# Altium PCB PCB_n-watch v2.0_2022-03-19.pcbdoc
Units mm, origin at the board's own origin, x right, y up, seen from the top; angles counter-clockwise.
Board outline 62.72 x 72.25 mm, 2 copper layers (Top Layer, Bottom Layer); 53 components, 63 nets, 234 pads, 221 vias.
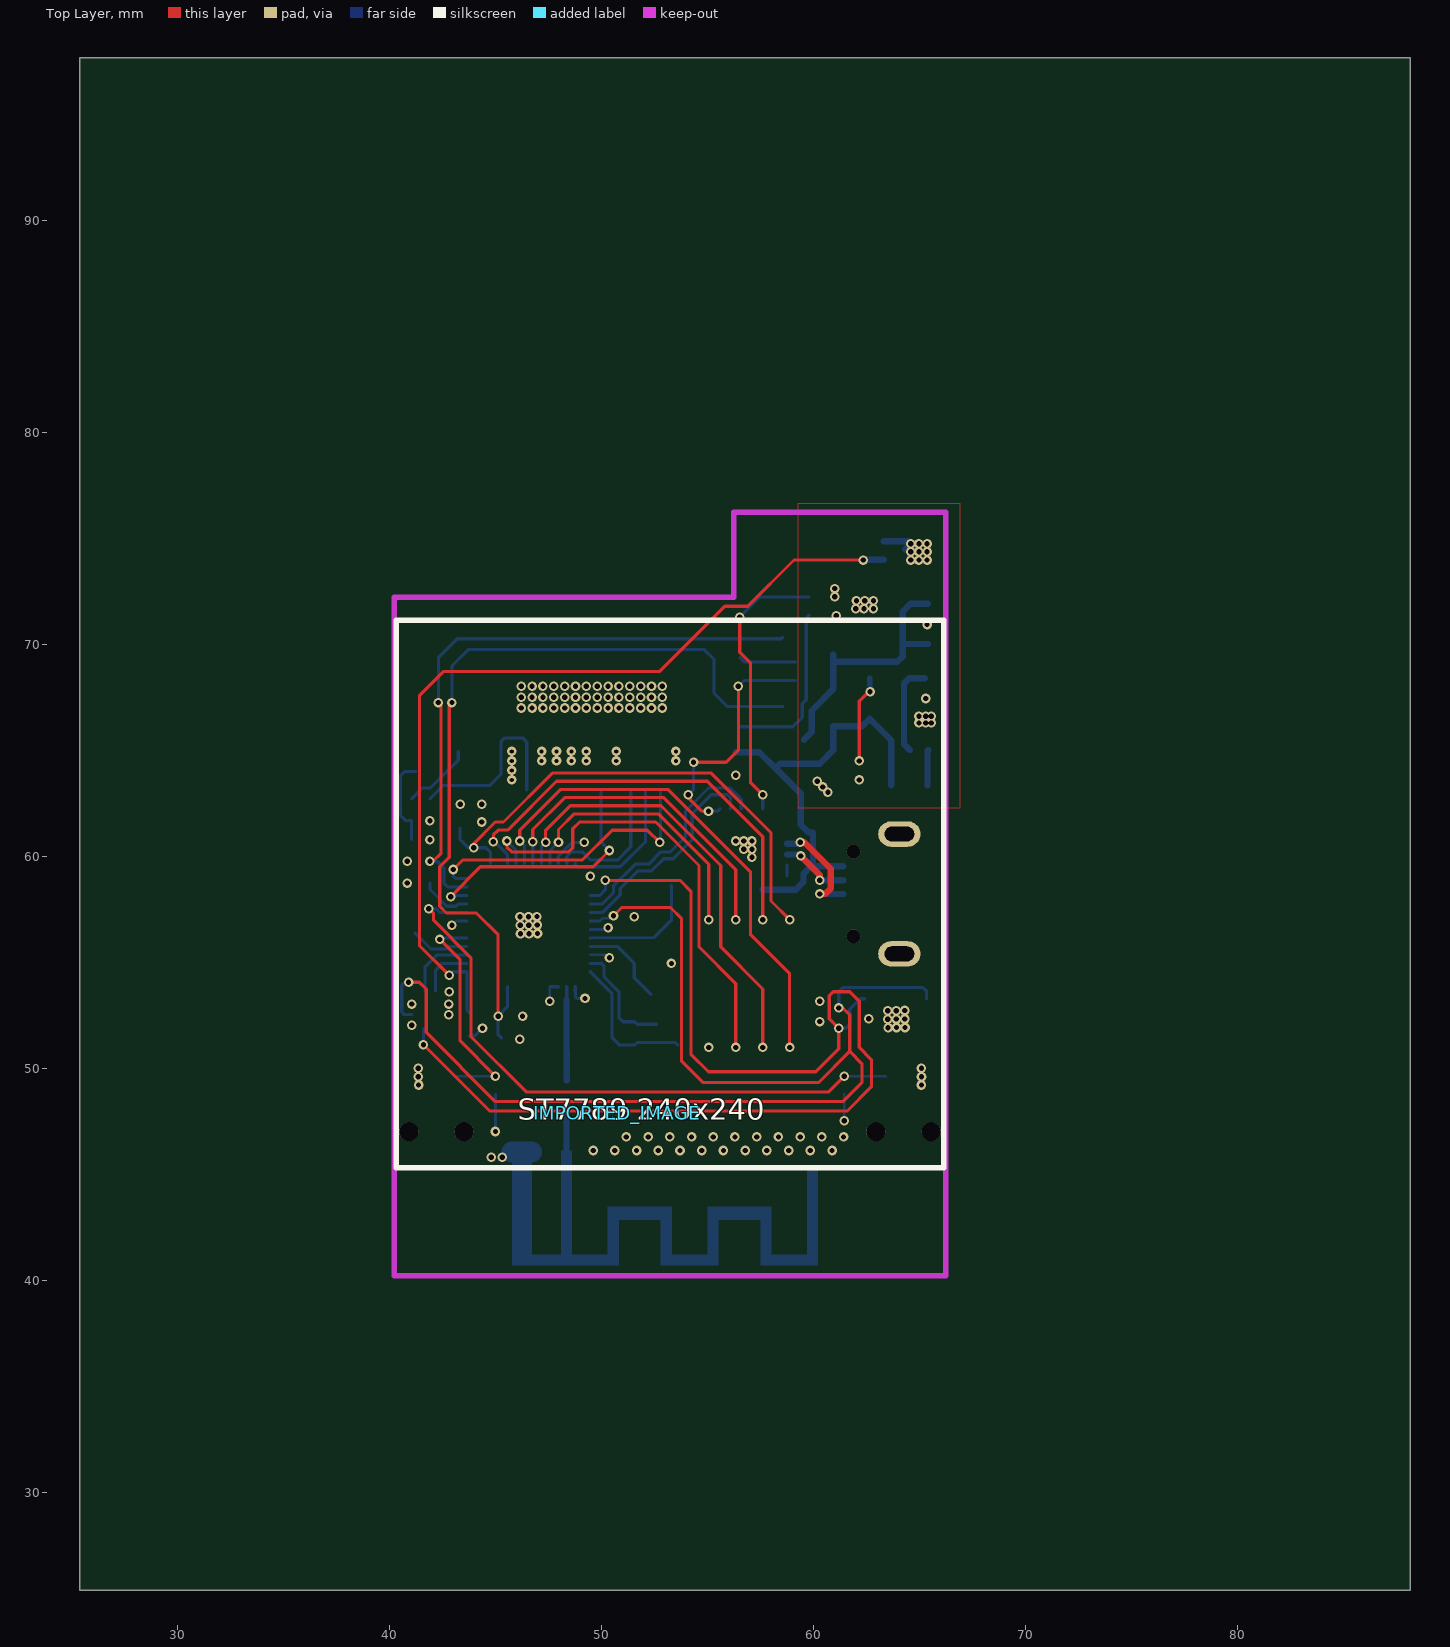
[diagram p0: Top Layer view]
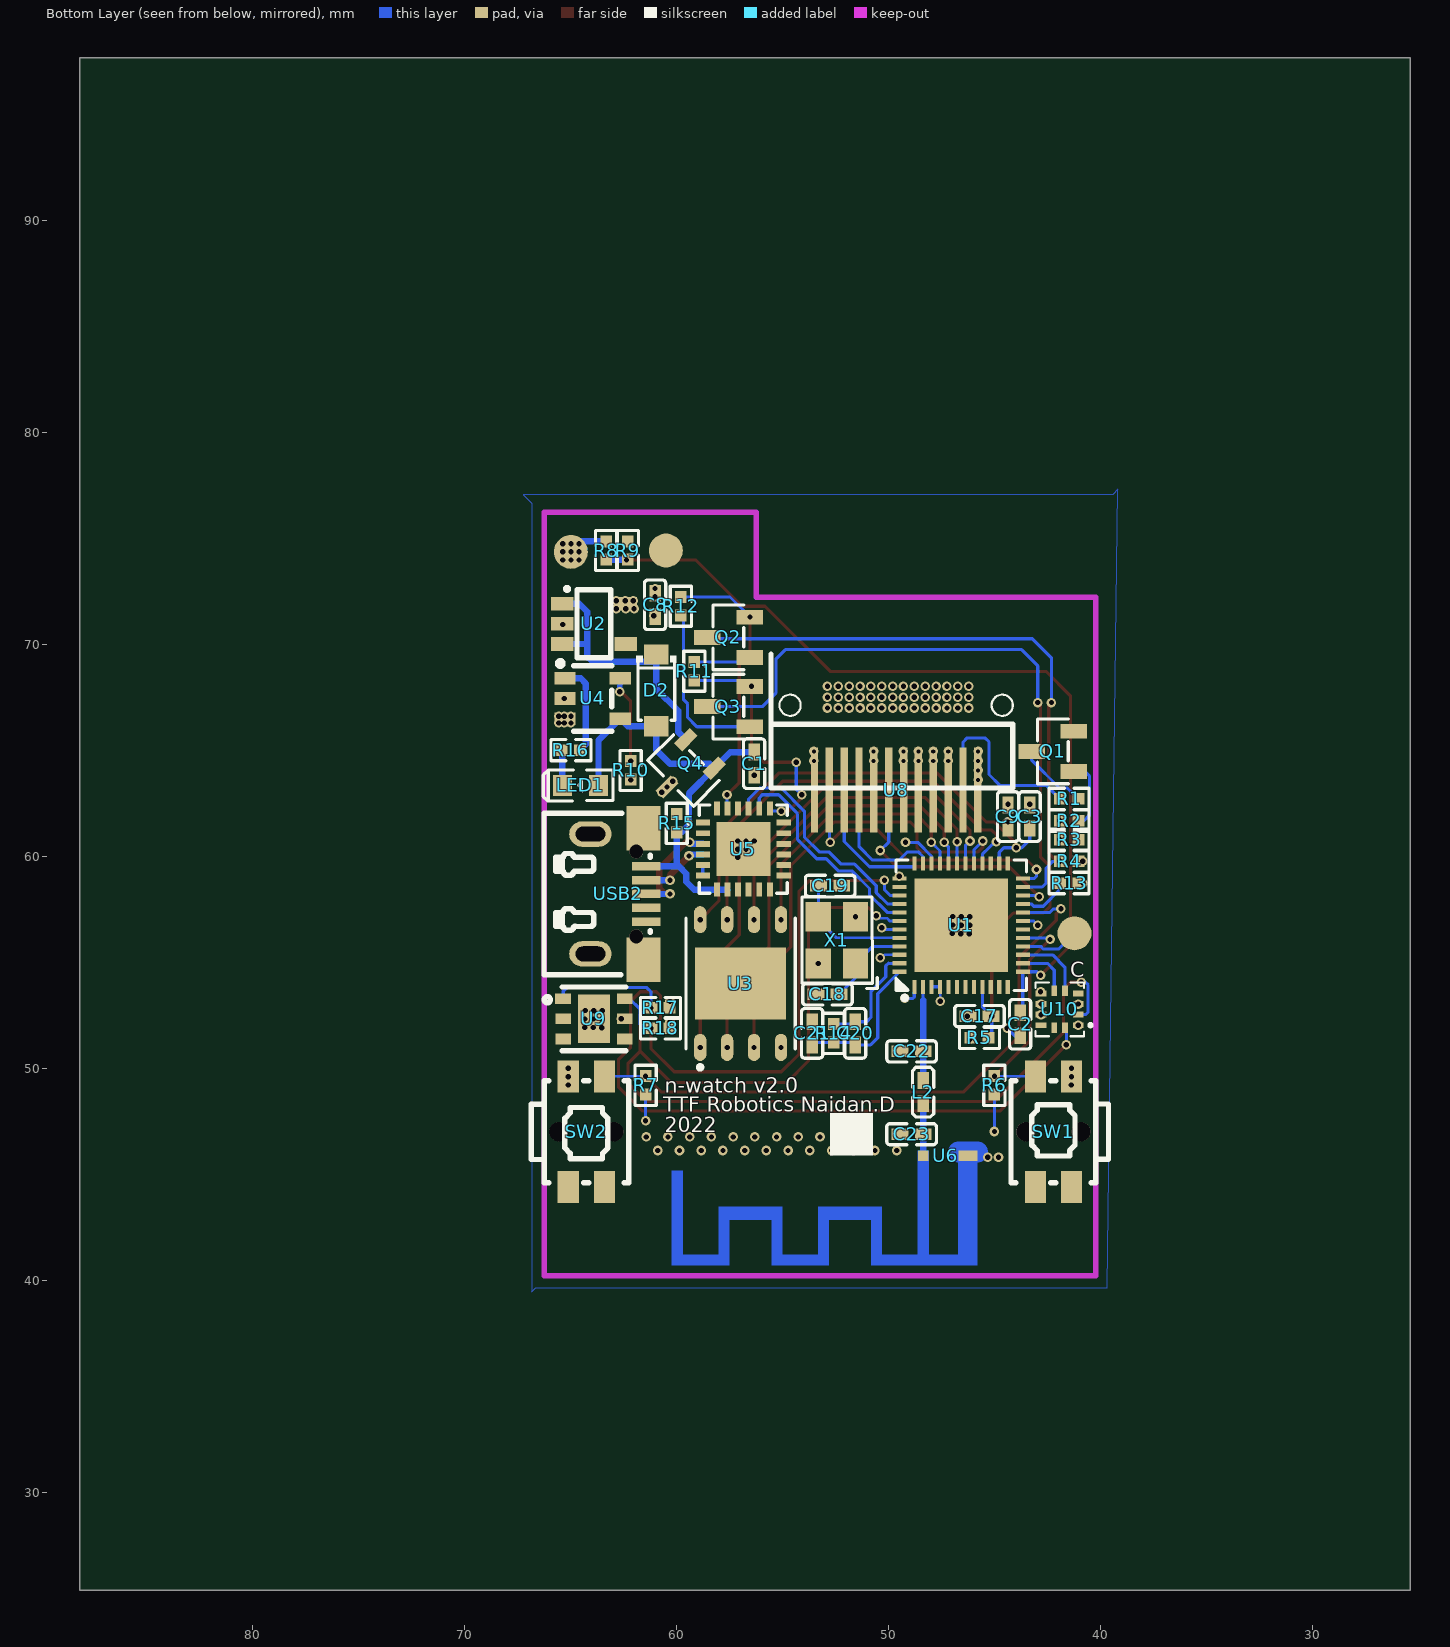
[diagram p1: Bottom Layer view, seen from below]

## Layer stack, top to bottom
Top Layer: signal copper (thickness not stored)
Dielectric: dielectric 0.32, FR-4, Dk 4.8
Bottom Layer: signal copper (thickness not stored)

## Board outline
88.122,25.4 25.4,25.4 25.4,97.654 88.122,97.654

## Components (designator, comment, footprint, x,y, rotation, side; value= is the part's Value field where it differs from the comment)
C1 "0.1uF" C0402 56.325,64.373 r90 bottom
C2 "0.1uF" C0402 43.781,52.085 r270 bottom
C3 "1uF" C0402 43.333,61.877 r90 bottom
C8 "4.7uF" C0402 60.997,71.861 r270 bottom
C9 "0.1uF" C0402 44.357,61.877 r90 bottom
C17 "0.1uF" C0402 45.701,52.469 r180 bottom
C18 "12pF" C0402 52.869,53.493 r0 bottom
C19 "12pF" C0402 52.741,58.613 r0 bottom
C20 "3.3nF/6.3V/(10%)" C0402 51.56,51.656 r90 bottom
C21 "10nF/6.3V(10%)" C0402 53.592,51.656 r270 bottom
C22 "4.7pF" C0402 48.901,50.805 r0 bottom
C23 "2.4pF" C0402 48.901,46.901 r180 bottom
D2 "MBR0530" SOD-123_L2.8-W1.8-LS3.7-RD 60.933,67.829 r90 bottom
IMPORTED_IMAGE "IMPORTED_IMAGE" IMPORTED_IMAGE 50.741,47.901 r0 top
L2 "2.4nH" L0402 48.357,48.885 r90 bottom
LED1 "LED-0603_R" LED0603_RED 64.517,63.349 r180 bottom
Q1 "S8050" SOT-23-3_L2.9-W1.3-P1.90-LS2.4-BR 42.245,64.949 r0 bottom
Q2 "S8050" SOT-23-3_L2.9-W1.3-P1.90-LS2.4-BR 57.541,70.325 r0 bottom
Q3 "S8050" SOT-23-3_L2.9-W1.3-P1.90-LS2.4-BR 57.541,67.061 r0 bottom
Q4 "CJ2301 S1" SOT-23-3_L3.0-W1.7-P0.95-LS2.9-BR 59.653,64.053 r315 bottom
R1 "10" R0402 41.477,62.709 r180 bottom
R2 "10k" R0402 41.477,61.685 r180 bottom
R3 "1k" R0402 41.477,60.789 r180 bottom
R4 "10k" R0402 41.477,59.765 r0 bottom
R5 "10k" R0402 45.701,51.445 r180 bottom
R6 "10k" R0402 44.997,49.205 r270 bottom
R7 "10k" R0402 61.445,49.205 r270 bottom
R8 "100k" R0402 63.301,74.421 r90 bottom
R9 "100k" R0402 62.277,74.421 r270 bottom
R10 "10k" R0402 62.149,64.053 r90 bottom
R11 "10k" R0402 59.141,68.725 r90 bottom
R12 "10k" R0402 59.781,71.797 r90 bottom
R13 "10k" R0402 41.477,58.741 r0 bottom
R14 "20k(5%)" R0402 52.576,51.656 r90 bottom
R15 "10k" R0402 59.973,61.557 r90 bottom
R16 "1k" R0402 64.965,65.013 r0 bottom
R17 "4.7k" R0402 60.741,52.853 r0 bottom
R18 "4.7k" R0402 60.741,51.893 r0 bottom
SW1 "K2-1114SA-A4SW-06" KEY-SMD_4P-L4.8-W4.6-P1.70-LS6.2 42.216,47.017 r270 bottom
SW2 "K2-1114SA-A4SW-06" KEY-SMD_4P-L4.8-W4.6-P1.70-LS6.2 64.238,47.017 r90 bottom
U1 "ESP32-D0WDQ6-V3" QFN-48_L6.0-W6.0-P0.40-BL-EP4.2 46.565,56.757 r0 bottom
U2 "RT9013-33GB" SOT-23-5 63.878,70.965 r0 bottom
U3 "W25Q32JVZPIQ" WSON-8_L6.0-W5.0-P1.27-BL-EP 56.965,54.005 r0 bottom
U4 "TP4054" SOT-23-5_L3.0-W1.7-P0.95-LS2.8-BR 63.941,67.445 r180 bottom
U5 "CP2104-F03-GMR" QFN-24_L4.0-W4.0-P0.50-BL-EP2.6 56.836,60.342 r90 bottom
U6 "PCB ANTENNA 2.4GHZ UNDER MASK" "PCB ANTENNA 2.4GHZ" 47.301,45.877 r180 bottom
U8 "ST7789-240X240 COPY" ST7789-240X240_NAIDAN 49.63,63.126 r0 bottom
U9 "SHT20" DFN-6_L3.0-W3.0-P0.95-TR-EP 63.877,52.341 r270 bottom
U10 "BMA400" LGA-12_L2.0-W2.0-P0.50-BL 41.925,52.789 r270 bottom
USB2 "U254-051T-4BH83-F1B" MINI-USB-SMD_U254-051T-4BH83-F1B 62.725,58.229 r90 bottom
X1 "40MHz" OSC-SMD_4P-L3.2-W2.5-BL 52.421,56.053 r270 bottom
? "" ? 53.227,79.926 r0 top
? "" ? 70.501,58.227 r0 top

## Footprints (in the part's own frame and the unit in brackets; to place one, negate y for a bottom-side part, rotate by r counter-clockwise, add the part's x,y. Pads: shape width x height; smd on the part's side, far side on the other; paste and mask are expansions set on the pad)
C0402 [mm]
  rect 0.79x0.54 smd: 1(0.545,0) 2(-0.545,0)
  silkscreen extent -1.17,-0.5 1.17,0.5
DFN-6_L3.0-W3.0-P0.95-TR-EP [mm]
  rect 0.5x0.75 smd: 1(-0.95,-1.452) 2(0,-1.451) 3(0.95,-1.45) 4(0.95,1.451) 5(0,1.452) 6(-0.95,1.451)
  rect 2.3x1.5 smd: 7(-0.004,0.001)
  silkscreen extent -1.5,-2.34 1.5,1.5
IMPORTED_IMAGE [mm]
KEY-SMD_4P-L4.8-W4.6-P1.70-LS6.2 [mm]
  rect 1.5x1 smd: 1(2.6,-0.85) 2(-2.6,-0.85) 3(2.6,0.85) 4(-2.6,0.85)
  round 0.9 hole 0.9 unplated: ""(0,-1.3) ""(0,1.3)
  silkscreen extent -2.4,-2 2.4,2.6
L0402 [mm]
  rect 0.79x0.54 smd: 1(0.545,0) 2(-0.545,0)
  silkscreen extent -1.17,-0.5 1.17,0.5
LED0603_RED [mm]
  rect 0.9x1 smd: 1(0.85,0) 2(-0.85,0)
  silkscreen extent -1.75,-0.73 1.54,0.73
LGA-12_L2.0-W2.0-P0.50-BL [mm]
  rect 0.28x0.5 smd: 1(0.75,0.875) 2(0.25,0.875) 3(-0.25,0.875) 4(-0.75,0.875) 7(-0.75,-0.875) 8(-0.25,-0.875) 9(0.25,-0.875) 10(0.75,-0.875)
  rect 0.5x0.28 smd: 5(-0.875,0.25) 6(-0.875,-0.25) 11(0.875,-0.25) 12(0.875,0.25)
  silkscreen extent -1.27,-1.14 1.27,1.53
MINI-USB-SMD_U254-051T-4BH83-F1B [mm]
  rect 0.4x1.35 smd: 1(1.3,-1.319) 2(0.65,-1.319) 3(0,-1.319) 4(-0.65,-1.319) 5(-1.3,-1.319)
  rect 2.1x1.6 smd: 6(-3.1,-1.182) 6(3.1,-1.182)
  oval 1.2x2 hole 0.7 slot 1.4 at 90 deg: 6(-2.825,1.318) 6(2.825,1.318)
  round 0.65 hole 0.65 unplated: ""(-2,-0.844) ""(2,-0.844)
  silkscreen extent -3.81,-1.49 3.81,3.51
OSC-SMD_4P-L3.2-W2.5-BL [mm]
  rect 1.4x1.2 smd: 1(1.1,0.875) 2(-1.1,0.875) 3(-1.1,-0.875) 4(1.1,-0.875)
  silkscreen extent -2.03,-1.65 2.29,1.9
"PCB ANTENNA 2.4GHZ" [mm]
  rect 0.9x0.5 smd: 1(1.05,0)
  rect 0.5x0.5 smd: 2(-1.05,0)
  Top Layer region: 1.5,0.25 0.6,0.25 0.6,-4.65 -0.8,-4.65 -0.8,0.25 -1.3,0.25 -1.3,-4.65 -3,-4.65 -3,-2.39 -6,-2.39 -6,-4.65 -7.7,-4.65 -7.7,-2.39 -10.7,-2.39 -10.7,-4.65 -12.4,-4.65 -12.4,-0.71 -12.9,-0.71 -12.9,-5.15 -10.2,-5.15 -10.2,-3.01 -8.2,-3.01 -8.2,-5.15 -5.5,-5.15 -5.5,-3.01 -3.5,-3.01 -3.5,-5.15 1.5,-5.15 1.5,0.25
QFN-24_L4.0-W4.0-P0.50-BL-EP2.6 [mm]
  rect 0.28x0.665 smd: 1(1.25,1.907) 2(0.75,1.907) 3(0.25,1.907) 4(-0.25,1.907) 5(-0.75,1.907) 6(-1.25,1.907) 13(-1.25,-1.907) 14(-0.75,-1.907) 15(-0.25,-1.907) 16(0.25,-1.907) 17(0.75,-1.907) 18(1.25,-1.907)
  rect 0.665x0.28 smd: 7(-1.907,1.25) 8(-1.907,0.75) 9(-1.907,0.25) 10(-1.907,-0.25) 11(-1.907,-0.75) 12(-1.907,-1.25) 19(1.907,-1.25) 20(1.907,-0.75) 21(1.907,-0.25) 22(1.907,0.25) 23(1.907,0.75) 24(1.907,1.25)
  rect 2.55x2.55 smd: 25(0,0)
  silkscreen extent -2.08,-2.08 2.08,2.61
QFN-48_L6.0-W6.0-P0.40-BL-EP4.2 [mm]
  rect 0.2x0.665 smd: 1(2.2,2.908) 2(1.8,2.908) 3(1.4,2.908) 4(1,2.908) 5(0.6,2.908) 6(0.2,2.908) 7(-0.2,2.908) 8(-0.6,2.908) 9(-1,2.908) 10(-1.4,2.908) 11(-1.8,2.908) 12(-2.2,2.908) 25(-2.2,-2.908) 26(-1.8,-2.908) 27(-1.4,-2.908) 28(-1,-2.908) 29(-0.6,-2.908) 30(-0.2,-2.908) 31(0.2,-2.908) 32(0.6,-2.908) 33(1,-2.908) 34(1.4,-2.908) 35(1.8,-2.908) 36(2.2,-2.908)
  rect 0.665x0.2 smd: 13(-2.908,2.2) 14(-2.908,1.8) 15(-2.908,1.4) 16(-2.908,1) 17(-2.908,0.6) 18(-2.908,0.2) 19(-2.908,-0.2) 20(-2.908,-0.6) 21(-2.908,-1) 22(-2.908,-1.4) 23(-2.908,-1.8) 24(-2.908,-2.2) 37(2.908,-2.2) 38(2.908,-1.8) 39(2.908,-1.4) 40(2.908,-1) 41(2.908,-0.6) 42(2.908,-0.2) 43(2.908,0.2) 44(2.908,0.6) 45(2.908,1) 46(2.908,1.4) 47(2.908,1.8) 48(2.908,2.2)
  rect 4.4x4.4 smd: 49(0,0)
  silkscreen extent -3.08,-3.08 3.08,3.53
R0402 [mm]
  rect 0.566x0.54 smd: 1(0.433,0) 2(-0.433,0)
  silkscreen extent -0.94,-0.5 0.94,0.5
SOD-123_L2.8-W1.8-LS3.7-RD [mm]
  rect 0.95x1.15 smd: 1(1.693,0) 2(-1.693,0)
  silkscreen extent -1.41,-0.94 1.63,0.94
SOT-23-3_L2.9-W1.3-P1.90-LS2.4-BR [mm]
  rect 1.25x0.7 smd: 1(-1,0.95) 2(-1,-0.95) 3(1,0)
  silkscreen extent -0.73,-1.53 0.73,1.53
SOT-23-3_L3.0-W1.7-P0.95-LS2.9-BR [mm]
  rect 1.037x0.532 smd: 1(-1.101,0.95) 2(-1.101,-0.95) 3(1.101,0)
  silkscreen extent -0.86,-1.53 0.86,1.53
SOT-23-5 [mm]
  rect 1.06x0.65 smd: 1(1.5,-0.95) 2(1.5,0) 3(1.5,0.95) 4(-1.5,0.95) 5(-1.5,-0.95)
  silkscreen extent -0.8,-1.71 1.33,1.6
SOT-23-5_L3.0-W1.7-P0.95-LS2.8-BR [mm]
  rect 1x0.6 smd: 1(-1.3,0.95) 2(-1.3,0) 3(-1.3,-0.95) 4(1.3,-0.95) 5(1.3,0.95)
  silkscreen extent -1.65,-1.55 0.9,1.78
ST7789-240X240_NAIDAN [mm]
  rect 0.35x4 smd: 1(-3.85,0) 2(-3.15,0) 3(-2.45,0) 4(-1.75,0) 5(-1.05,0) 6(-0.35,0) 7(0.35,0) 8(1.05,0) 9(1.75,0) 10(2.45,0) 11(3.15,0) 12(3.85,0)
  silkscreen extent -5.5,-6.4 5.9,-0.1
WSON-8_L6.0-W5.0-P1.27-BL-EP [mm]
  oval 0.581x1.276 smd: 1(1.905,3.013) 2(0.635,3.013) 3(-0.635,3.013) 4(-1.905,3.013) 5(-1.905,-3.013) 6(-0.635,-3.013) 7(0.635,-3.013) 8(1.905,-3.013)
  rect 4.3x3.4 smd: 9(0,0)
  silkscreen extent -2.58,-3.08 2.58,4.05
? [mm]

## Free pads (board coordinates)
  round 1.6 smd far side: 1(41.221,56.373) 1(60.485,74.421) 1(64.965,74.357)

## Via types
v1: diameter 0.45, hole 0.25, Top Layer to Bottom Layer, tented both sides, 204 vias
v2: diameter 0.45, hole 0.2, Top Layer to Bottom Layer, tented both sides, 16 vias
v3: diameter 0.4, hole 0.2, Top Layer to Bottom Layer, tented both sides, 1 vias

## Nets (pads, with @x,y where several pads share a name; then routed paths per layer and width w, separated by ;. In a path a pad name is that pad's centre, name@x,y a point inside that pad or via, vN(x,y) a via of type N, cw(c..) or ccw(c..) an arc to the next point about the centre after c; other vN are vias at no path point)
+5V: C1.1 D2.2 LED1.1 Q4.1 R15.2 U4.4 U5.7 U5.8 USB2.1 | length 21.9
  Bottom Layer w0.3: C1.1 57.445,64.918 Q4.1 58.416,64.373 60.293,64.373 60.933,65.013 D2.2 62.283,66.137 U4.4 63.667,65.469 LED1.1 ; U5.8@57.587,58.434 U5.7@57.959,58.434 ; U5.7 59.153,58.434 59.526,58.805 59.526,59.189 59.866,59.529 60.146,59.529 ; Q4.1 59.396,62.966 59.396,61.492 59.767,61.124 R15.2 59.973,59.529 USB2.1@61.406,59.529
ACC_INT_1: U1.15 U10.5 | length 3.3
  Bottom Layer w0.15: U10.5@41.675,53.664 41.675,54.779 42.254,55.356 U1.15@43.656,55.356
ACC_INT_2: U1.14 U10.6 | length 2.6
  Bottom Layer w0.15: U10.6 42.175,54.639 42.493,54.957 U1.14
BAT: pad.1@64.965,74.357 Q4.3 R8.1 U4.3 | length 2.3
  Bottom Layer w0.3: R8.1 64.468,74.854 v1(64.581,74.741) ; pad.1@64.327,74.485 pad.1@64.582,74.74 ; pad.1@64.532,74.79 v1(64.965,74.357)
  other v1: 60.677,63.029 60.432,63.274 60.165,63.541 64.965,66.293 65.285,66.293 65.541,66.293 64.965,66.613 65.285,66.613 65.541,66.613 64.581,73.973 64.965,73.973 65.349,73.973 64.581,74.357 65.349,74.357 64.965,74.741 65.349,74.741
BAT_ANALOG: C2.2 R8.2 R9.1 U1.13 | length 41.2
  Top Layer w0.15: v1@42.82,54.388 41.413,55.798 41.413,67.576 42.566,68.724 52.742,68.724 55.815,71.797 56.9,71.797 59.076,73.974 v1@62.34,73.974
  Bottom Layer w0.15: v1(42.821,54.389) 42.989,54.557 U1.13 43.657,52.754 C2.2
  Bottom Layer w0.3: v1(62.341,73.973) 62.356,73.988 R8.2
BLK: R3.2 U1.34 | length 9.9
  Mid-Layer 2 w0.15: v1(41.91,60.789) 42.87,59.829 48.133,59.829 48.965,60.661 v1(49.189,60.661)
  Bottom Layer w0.15: U1.34@47.964,59.664 47.964,60.014 48.614,60.662 v1@49.188,60.662
BOOT: Q2.3 R4.1 U1.23 | length 29.3
  Top Layer w0.15: v1(41.911,59.765) 42.053,59.765 42.437,60.149 42.437,67.253 v1(42.309,67.253)
  Bottom Layer w0.15: v1(41.911,59.765) 42.246,59.765 42.566,59.445 42.566,58.739 42.749,58.556 U1.23@43.656,58.556 ; v1(42.309,67.253) 42.31,69.364 43.206,70.261 43.205,70.261 58.477,70.261 Q2.3
BTN1: R6.2 SW1.2 U1.17 | length 10.8
  Top Layer w0.15: v1(42.373,56.085) 43.333,55.125 43.333,51.302 v1(44.997,49.638)
  Bottom Layer w0.15: v1(42.373,56.085) 42.445,56.157 U1.17 ; SW1.2@43.067,49.618 v1(44.997,49.638)
BTN2: R7.2 SW2.1 U1.20 | length 29.6
  Top Layer w0.15: v1@41.86,57.525 42.084,57.301 42.084,56.981 43.844,55.221 43.844,51.51 46.47,48.884 60.692,48.884 v1(61.446,49.638)
  Bottom Layer w0.15: v1(41.861,57.525) 42.213,57.525 42.381,57.357 U1.20 ; v1(61.446,49.638) SW2.1@63.387,49.618
CAP: pad.1@41.221,56.373 U1.16 | length 2.8
  Bottom Layer w0.15: pad.1@41.221,56.373 41.96,55.635 42.691,55.635 42.813,55.757 U1.16
CAP1: C20.2 C21.1 R14.2 U1.48 | length 6.9
  Bottom Layer w0.15: U1.48 50.501,53.528 50.501,51.445 50.835,51.111 50.879,51.111 C20.2 51.673,51.224 R14.2 53.48,51.224 C21.1
CAP2: C20.1 R14.1 U1.47 | length 5.3
  Bottom Layer w0.15: U1.47 49.988,54.965 50.118,54.838 50.118,54.325 50.821,53.621 50.821,52.404 51.025,52.201 C20.1 ; C20.1 51.673,52.089 R14.1
D15: R13.1 U1.21 | length 2.4
  Bottom Layer w0.15: R13.1@41.911,58.742 41.911,58.437 42.693,57.652 43.14,57.652 43.237,57.749 U1.21@43.656,57.749
DC: U1.22 U8.7 | length 12.2
  Top Layer w0.15: v1@42.884,58.102 44.291,59.509 49.605,59.509 v1@50.374,60.278
  Bottom Layer w0.15: v1(42.885,58.101) 42.942,58.157 U1.22@43.656,58.157 ; U8.7 49.979,60.674 v1@50.374,60.278
  other v1: 50.373,60.277
DTR: Q2.2 R12.1 U5.23 | length 13.2
  Top Layer w0.15: v1@56.516,71.284 56.516,69.62 57.029,69.11 57.029,63.476 v1@57.606,62.902
  Bottom Layer w0.15: U5.23@57.587,62.249 57.605,62.267 v1(57.605,62.901) ; R12.1 57.462,72.23 v1(56.517,71.285) ; v1(56.517,71.285) 56.531,71.285 Q2.2 56.528,71.275 v1(56.517,71.285)
EN: C17.1 Q3.3 R5.1 U1.9 | length 39.4
  Top Layer w0.15: v1(42.949,67.253) 42.82,67.124 42.82,59.958 42.373,59.511 42.373,57.653 42.693,57.333 44.101,57.333 45.125,56.309 v1(45.125,52.469)
  Bottom Layer w0.15: v1(42.949,67.253) 42.95,68.982 43.717,69.749 54.853,69.749 55.302,69.3 55.302,67.7 55.941,67.061 Q3.3 ; C17.1 v1(45.125,52.469) ; R5.1 45.125,51.588 v1(45.125,52.469) ; U1.9 45.565,52.909 v1(45.125,52.469)
GND: C1.2 C2.1 C3.1 C8.1 C9.1 C17.2 C18.1 C19.2 C21.2 C22.1 C23.2 pad.1@60.485,74.421 Q1.2 R6.1 R7.1 R9.2 R10.2 R13.2 R15.1 U1.49 U2.2 U3.4 U4.2 U5.2 U5.25 U6.1 U8.1 U8.5 U8.6 U8.8 U8.12 U9.2 U9.7 U10.1 U10.8 U10.9 USB2.5 USB2.6 X1.2 X1.4 | length 5.1
  Bottom Layer w0.127: v1(44.997,47.029) R6.1 ; v1(61.445,47.541) R7.1
  Bottom Layer w0.15: C2.1 44.036,51.54 v1(44.389,51.893)
  Bottom Layer w1: 45.791,46.069 46.687,46.069 U6.1@46.213,46.069
  other v1: 44.805,45.813 45.317,45.813 49.605,46.133 50.629,46.133 51.653,46.133 52.677,46.133 53.701,46.133 54.725,46.133 55.749,46.133 56.773,46.133 57.797,46.133 58.821,46.133 59.845,46.133 60.869,46.133 51.173,46.773 52.196,46.773 53.22,46.773 54.244,46.773 55.268,46.773 56.292,46.773 57.317,46.773 58.34,46.773 59.365,46.773 60.389,46.773 61.412,46.773 55.06,50.992 63.509,51.925 63.909,51.933 64.309,51.933 41.05,52.039 63.501,52.325 63.902,52.329 64.301,52.333 46.277,52.469 42.8,52.539 63.493,52.725 63.893,52.725 64.293,52.733 42.8,53.039 53.296,54.953 46.181,56.349 46.581,56.357 46.981,56.365 46.165,56.749 46.565,56.757 46.965,56.765 46.157,57.149 46.557,57.157 51.546,57.153 46.957,57.165 40.837,58.741 57.093,59.957 56.709,60.341 57.093,60.341 56.325,60.725 56.709,60.725 57.093,60.725 43.333,62.453 44.357,62.453 62.149,63.605 56.325,63.828 46.213,66.997 46.725,66.997 47.237,66.997 47.749,66.997 48.261,66.997 48.773,66.997 49.285,66.997 49.797,66.997 50.309,66.997 50.821,66.997 51.333,66.997 51.845,66.997 52.357,66.997 52.869,66.997 65.285,67.445 46.213,67.509 46.725,67.509 47.237,67.509 47.749,67.509 48.261,67.509 48.773,67.509 49.285,67.509 49.797,67.509 50.309,67.509 50.821,67.509 51.333,67.509 51.845,67.509 52.357,67.509 52.869,67.509 46.213,68.021 46.725,68.021 47.237,68.021 47.749,68.021 48.261,68.021 48.773,68.021 49.285,68.021 49.797,68.021 50.309,68.021 50.821,68.021 51.333,68.021 51.845,68.021 52.357,68.021 52.869,68.021 65.35,70.933 61.061,71.349
  other v2: 45.765,63.605 45.765,64.053 45.765,64.501 48.581,64.501 49.285,64.501 50.693,64.501 53.509,64.501 45.765,64.949 48.581,64.949 49.285,64.949 50.693,64.949 53.509,64.949
  other v3: 46.165,56.749
I2C_SCL: R18.1 U1.39 U9.6 U10.12 | length 55.5
  Top Layer w0.15: v1(41.605,51.125) 44.741,47.99 61.573,47.99 62.726,49.14 62.726,50.421 62.15,50.997 62.15,53.174 61.7,53.621 60.933,53.621 60.74,53.428 60.74,52.343 61.19,51.894 61.19,50.934 60.1,49.844 55.045,49.844 54.212,50.677 54.212,58.358 53.702,58.869 v1(50.181,58.869)
  Bottom Layer w0.15: v1(41.605,51.125) 41.605,51.844 U10.12 ; U1.39@49.473,58.157 49.918,58.157 50.181,58.421 v1(50.181,58.869) ; v1(61.189,51.893) 61.509,51.893 61.701,52.085 61.701,52.789 62.203,53.291 U9.6
I2C_SDA: R17.1 U1.42 U9.1 U10.2 | length 57.4
  Top Layer w0.15: v1@40.9,54.068 41.413,54.068 41.733,53.748 41.733,51.701 44.997,48.437 61.38,48.437 62.277,49.333 62.277,50.23 61.7,50.804 ; v1@50.565,57.205 50.948,57.588 53.255,57.588 53.765,57.078 53.765,50.357 54.789,49.333 60.229,49.333 61.7,50.804 ; v1@61.19,52.854 61.38,52.854 61.7,52.534 61.7,50.804
  Bottom Layer w0.127: U1.42 49.933,56.957 50.066,57.09 50.451,57.09 v1(50.565,57.205)
  Bottom Layer w0.15: v1(40.901,54.069) 40.709,54.069 40.581,53.941 40.581,52.661 40.703,52.539 U10.2 ; R17.1@61.19,52.854 61.19,53.621 61.383,53.814 65.157,53.814 65.33,53.641 U9.1
  other v1: 61.189,52.853
L2_2: C23.1 L2.2 U6.2 | length 2.7
  Bottom Layer w0.292: U6.2 48.351,46.556 48.355,46.56 ; 48.356,46.355 C23.1 L2.2 L2.2@48.357,48.34
LEDK: R1.2 U8.2 | length 9
  Bottom Layer w0.15: R1.2 42.551,63.349 44.741,63.349 45.254,63.862 45.254,65.396 45.444,65.59 46.277,65.59 46.479,65.388 U8.2
LNA_IN: C22.2 L2.1 U1.2 | length 4.6
  Bottom Layer w0.15: 48.358,53.014 U1.2
  Bottom Layer w0.292: C22.2@48.355,50.804 48.355,53.215 ; L2.1 C22.2
Q1_1: Q1.1 R2.1 R3.1 | length 4.2
  Bottom Layer w0.15: R3.1 R2.1 ; R2.1@41.045,61.686 40.773,61.686 40.517,61.942 40.517,63.796 40.712,63.997 Q1.1@41.246,63.999
Q1_3: Q1.3 R1.1 | length 3.4
  Bottom Layer w0.15: R1.1 41.555,63.222 41.926,63.222 43.245,64.54 Q1.3@43.245,64.949
Q2_1: Q2.1 R11.1 | length 2.7
  Bottom Layer w0.15: Q2.1 56.758,69.158 R11.1
Q3_1: Q3.1 R12.2 | length 8.1
  Bottom Layer w0.15: Q3.1 59.023,66.11 59.462,66.55 59.462,67.19 59.653,67.38 59.653,71.238 R12.2@59.78,71.365
R16_1: LED1.2 R16.1 | length 1.7
  Bottom Layer w0.3: LED1.2 65.367,64.982 R16.1
RES: U1.24 U8.11 | length 14.2
  Top Layer w0.15: v1@43.013,59.382 43.46,59.829 49.094,59.829 50.501,61.236 52.165,61.236 v1@52.742,60.662
  Bottom Layer w0.15: v1@43.013,59.382 43.013,59.062 43.118,58.958 U1.24@43.656,58.958 ; v1(52.741,60.661) 52.779,60.699 U8.11@52.779,63.127
  other v1: 43.013,59.381
RTS: Q3.2 R11.2 U5.19 | length 11.8
  Top Layer w0.15: v1(54.085,62.901) 54.085,62.773 54.725,62.133 v1(55.045,62.133) ; v1(54.341,64.437) 55.876,64.436 56.453,65.013 v1@56.453,68.02
  Bottom Layer w0.15: v1(54.085,62.901) 54.341,63.157 v1(54.341,64.437) ; v1(55.045,62.133) 55.472,62.133 U5.19@55.587,62.249 ; Q3.2 56.463,68.011 v1(56.453,68.021) 56.725,68.292 R11.2
RXD: U1.40 U5.21 | length 10.9
  Bottom Layer w0.15: U1.40 50.029,57.756 50.565,58.292 50.565,58.612 51.588,59.638 52.223,59.638 52.8,60.212 53.252,60.212 53.958,60.916 53.958,62.133 55.045,63.222 56.069,63.222 56.587,62.704 U5.21
S$21: 
S$23: 
S$5843: 
S$5849: 
S$5863: 
S$5867: 
S$9120: 
S$9123: 
S$27676: 
S$28833: 
S$29383: 
S$29385: 
S$29387: 
S$29390: 
SCL: U1.35 U8.9 | length 6.5
  Bottom Layer w0.15: U1.35 48.365,59.996 48.581,60.212 49.094,60.212 49.478,59.829 50.758,59.829 51.379,60.45 U8.9
SD_0: U1.32 U3.2 | length 21
  Top Layer w0.15: v1(47.365,60.661) 47.365,61.236 48.518,62.389 52.805,62.389 55.622,59.572 55.622,55.734 57.606,53.748 57.606,50.998 v1(57.6,50.992)
  Bottom Layer w0.15: U1.32 47.165,60.461 v1(47.365,60.661)
SD_1: U1.33 U3.5 | length 12.8
  Top Layer w0.15: v1(47.973,60.661) 47.973,61.269 48.709,62.005 52.677,62.005 55.06,59.622 v1(55.06,57.017)
  Bottom Layer w0.15: U1.33 47.565,60.253 v1(47.973,60.661)
SD_2: U1.28 U3.7 | length 20.4
  Top Layer w0.15: v1@44.901,60.693 44.901,61.013 45.125,61.237 45.573,61.237 47.877,63.541 54.981,63.541 57.6,60.922 v1(57.6,57.017)
  Bottom Layer w0.15: v1(44.901,60.693) 44.965,60.693 45.253,60.405 45.565,60.093 U1.28
SD_3: U1.29 U3.3 | length 21.9
  Top Layer w0.15: v1@45.541,60.725 45.541,60.436 45.764,60.212 48.452,60.212 48.645,60.405 48.645,61.301 48.965,61.621 52.549,61.621 54.598,59.572 54.598,55.734 56.33,54.003 v1(56.33,50.992)
  Bottom Layer w0.15: v1(45.541,60.725) 45.965,60.301 U1.29
SD_CLK: U1.31 U3.6 | length 15.6
  Top Layer w0.15: v1(46.757,60.693) 46.757,61.269 48.261,62.773 52.933,62.773 56.33,59.376 v1(56.33,57.017)
  Bottom Layer w0.15: v1(46.757,60.693) 46.757,59.672 U1.31
SD_CMD: U1.30 U3.1 | length 24
  Top Layer w0.15: v1(46.149,60.725) 46.149,61.237 48.069,63.157 53.125,63.157 57.029,59.253 57.029,56.308 58.87,54.467 v1(58.87,50.992)
  Bottom Layer w0.15: v1(46.149,60.725) 46.365,60.509 U1.30
SDA: U1.36 U8.10 | length 6.3
  Bottom Layer w0.15: U1.36@48.764,59.664 48.764,59.582 48.838,59.509 50.885,59.509 52.079,60.703 U8.10
TXD: U1.41 U5.20 | length 10.4
  Bottom Layer w0.15: U1.41@49.473,57.357 50.057,57.357 50.885,58.185 50.885,58.485 51.718,59.318 52.358,59.318 52.932,59.892 53.382,59.892 54.149,60.662 54.278,60.791 54.278,62.006 55.172,62.902 55.942,62.902 56.087,62.755 U5.20
U2_1: D2.1 Q4.2 U2.1 U2.3 | length 12.9
  Bottom Layer w0.3: Q4.2 59.909,65.866 59.909,66.87 60.933,67.893 D2.1 60.933,69.173 63.94,69.173 64.197,69.42 64.197,70.005 ; U2.3 64.197,70.004 64.197,71.541 64.57,71.914 U2.1
U4_1: R16.2 U4.1 | length 4.3
  Bottom Layer w0.3: R16.2 64.261,65.285 64.261,68.148 64.507,68.395 U4.1@65.241,68.395
U4_5: R10.1 U4.5 | length 4.1
  Top Layer w0.15: v1(62.149,64.501) 62.149,67.317 62.597,67.765 v1(62.661,67.765)
  Bottom Layer w0.254: U4.5@62.64,68.396 v1@62.66,67.766
U5_3: U5.3 USB2.3 | length 5.3
  Top Layer w0.3: v1@59.366,60.662 59.556,60.662 60.806,59.412 60.806,58.485 60.55,58.229 v1(60.293,58.229)
  Bottom Layer w0.3: U5.3@58.745,60.591 59.365,60.591 v1(59.365,60.661) ; v1(60.293,58.229) USB2.3
U5_4: U5.4 USB2.2 | length 3.4
  Top Layer w0.3: v1(59.397,60.021) 60.293,59.125 v1(60.293,58.869)
  Bottom Layer w0.3: U5.4@58.745,60.091 59.397,60.091 v1(59.397,60.021) ; v1(60.293,58.869) 61.396,58.869 USB2.2
U5_5: U5.5 U5.6 | length 0.5
  Bottom Layer w0.15: U5.6@58.745,59.091 U5.5@58.745,59.591
VCC: C8.2 C9.2 R2.2 R4.2 R5.2 R17.2 R18.2 SW1.4 SW2.3 U1.1 U1.3 U1.4 U1.19 U1.37 U1.43 U1.46 U2.5 U8.3 U8.4 U9.5 U10.3 U10.7 | length 5.4
  Bottom Layer w0.127: v1(42.949,56.757) 43.149,56.957 U1.19 ; U1.46 50.181,55.349 50.309,55.221 v1(50.373,55.221) ; U1.43 50.309,56.557 v1(50.309,56.629) ; U1.4@47.557,53.842 U1.4 U1.4@47.557,53.842 ; U1.4@47.557,53.842 v1(47.557,53.173) U1.4@47.557,53.842
  Bottom Layer w0.15: U1.4 U1.3 ; U1.1@48.764,53.85 48.774,53.364 48.838,53.301 v1(49.221,53.301)
  other v1: 41.373,49.221 65.085,49.221 41.366,49.617 65.087,49.617 41.365,50.013 65.085,50.013 46.149,51.381 60.293,52.213 62.597,52.341 41.05,53.039 60.293,53.173 42.821,53.621 49.477,59.061 40.837,59.765 44.357,61.621 41.91,61.685 61.989,71.669 62.373,71.669 62.821,71.669 62.021,72.053 62.405,72.053 62.821,72.053 60.997,72.245 60.997,72.629
  other v2: 47.173,64.501 47.877,64.501 47.173,64.949 47.877,64.949
VDD_SDIO: C3.2 U1.26 U3.8 | length 24
  Top Layer w0.15: v1(43.973,60.405) 43.973,60.598 44.997,61.622 45.381,61.622 47.684,63.926 55.172,63.926 57.989,61.109 57.989,57.898 v1(58.87,57.017)
  Bottom Layer w0.15: C3.2@43.333,61.332 43.333,60.789 43.717,60.405 44.55,60.405 44.766,60.189 U1.26
XTAL_N: C19.1 U1.44 X1.3 | length 5.8
  Bottom Layer w0.15: U1.44 52.485,56.181 53.295,56.992 X1.3@53.295,57.154 ; C19.1 53.296,58.603 X1.3
XTAL_P: C18.2 U1.45 X1.1 | length 4.2
  Bottom Layer w0.15: U1.45 50.742,55.757 X1.1 51.546,54.271 C18.2
pads on no net: SW1. SW1.1 SW1.3 SW2. SW2.2 SW2.4 U1.5 U1.6 U1.7 U1.8 U1.10 U1.11 U1.12 U1.18 U1.25 U1.27 U1.38 U2.4 U3.9 U5.1 U5.9 U5.10 U5.11 U5.12 U5.13 U5.14 U5.15 U5.16 U5.17 U5.18 U5.22 U5.24 U9.3 U9.4 U10.4 U10.10 U10.11 USB2. USB2.4

## Polygon pours and split planes (outlines as drawn)
VCC on Mid-Layer 2 (solid): 39.493,77.045 39.813,77.365 67.077,77.365 67.077,39.413 67.013,39.477 39.493,39.477
GND on Mid-Layer 1 (solid): 39.237,76.917 39.685,77.365 67.205,77.365 67.141,77.301 67.141,39.413 67.013,39.541 39.301,39.541
BAT on Top Layer (solid): 59.269,76.661 66.885,76.661 66.885,64.821 66.885,62.261 59.269,62.261
GND on Bottom Layer (solid): 66.821,39.477 66.629,39.669 39.685,39.669 39.173,77.301 39.429,77.045 67.205,77.045 66.821,76.661 66.821,39.477

## Other copper
Top Layer:
  pour cut-out: 66.227,45.621 66.227,40.16 40.192,40.16 40.192,45.621
Mid-Layer 1:
  pour cut-out: 66.262,45.62 66.262,40.159 40.227,40.159 40.227,45.62
Mid-Layer 2:
  pour cut-out: 40.227,45.62 40.227,40.159 66.262,40.159 66.262,45.62
Bottom Layer:
  pour cut-out: 66.227,45.614 66.227,40.153 40.192,40.153 40.192,45.614

## Silkscreen, mask and mechanical layers (free items; w line width, h text height)
Bottom Overlay:
  text "C" at 41.413,54.295 h0.7
  text "n-watch v2.0" at 60.549,48.855 h0.7
  text "TTF Robotics Naidan.D" at 60.613,47.959 h0.7
  text "2022" at 60.549,46.999 h0.7
Document:
  lines w0.254 net S$5843: 38.227,40.227 38.227,76.227
  lines w0.254 net S$5849: 38.227,40.227 ccw(c40.227,40.227) 40.227,38.227 ; 38.227,76.227 cw(c40.227,76.227) 40.227,78.227 66.227,78.227 cw(c66.227,76.227) 68.227,76.227 ; 66.227,38.227 ccw(c66.227,40.227) 68.227,40.227
  lines w0.254 net S$5863: 68.227,40.227 68.227,76.227
  lines w0.254 net S$5867: 40.227,38.227 66.227,38.227
  lines w0.254 net S$9120: 66.213,62.037 68.203,62.037 68.227,62.037
  lines w0.254 net S$9123: 66.229,54.421 68.195,54.421 68.227,54.389

## Text inside footprints (layer, text, board x,y; h text height)
U6: Document "GND PLANE" at 45.6,45.837 h0.25; Document "NO GND PLANE TOP OR BOTTOM" at 45.637,45.112 h0.25
U8: Top Overlay "ST7789 240x240" at 46.048,47.58 h1